# Altium PCB mainV2.PcbDoc (part 1 of 2)
Units mm, origin at the board's own origin, x right, y up, seen from the top; angles counter-clockwise.
Board outline 72.95 x 37.26 mm, 2 copper layers (Top Layer, Bottom Layer); 97 components, 79 nets, 317 pads, 139 vias.
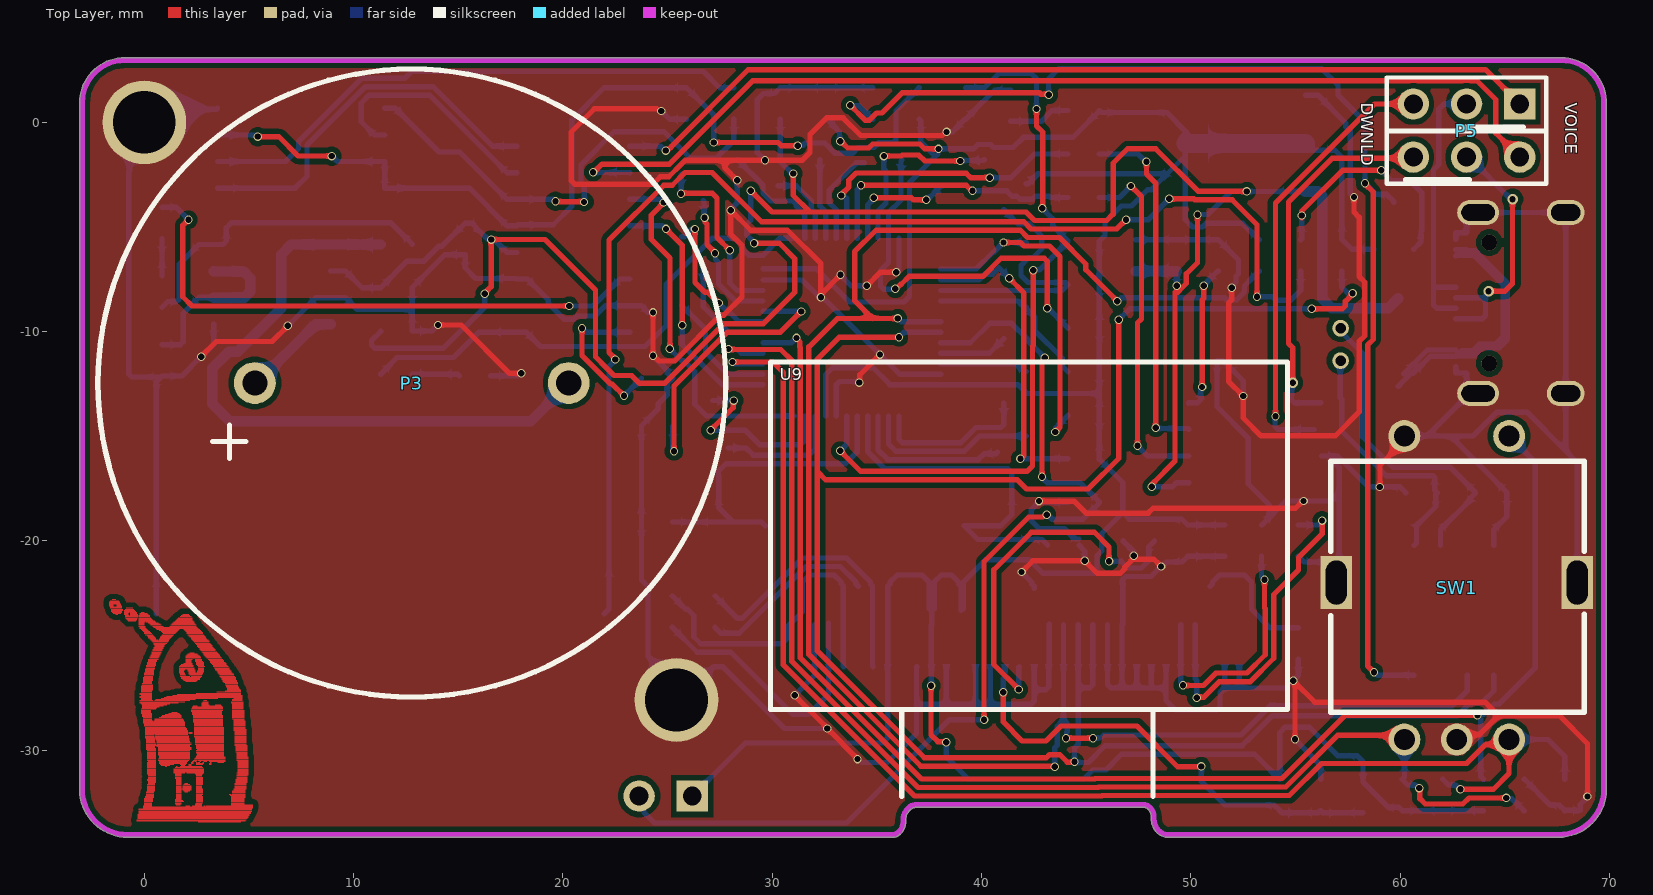
[diagram p0: Top Layer view]
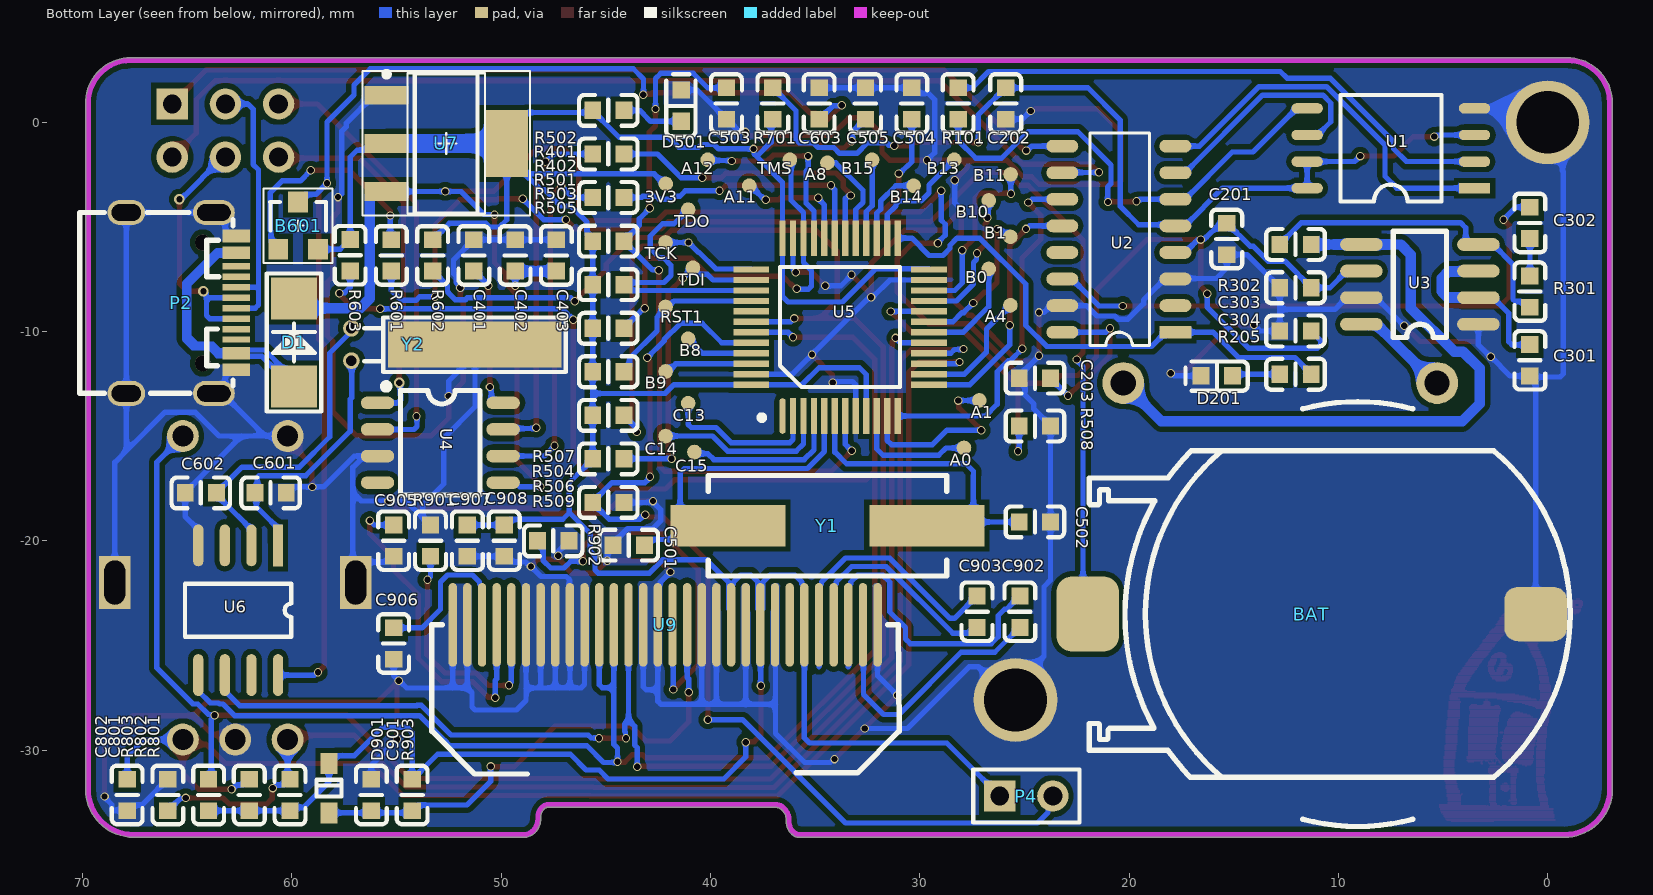
[diagram p1: Bottom Layer view, seen from below]
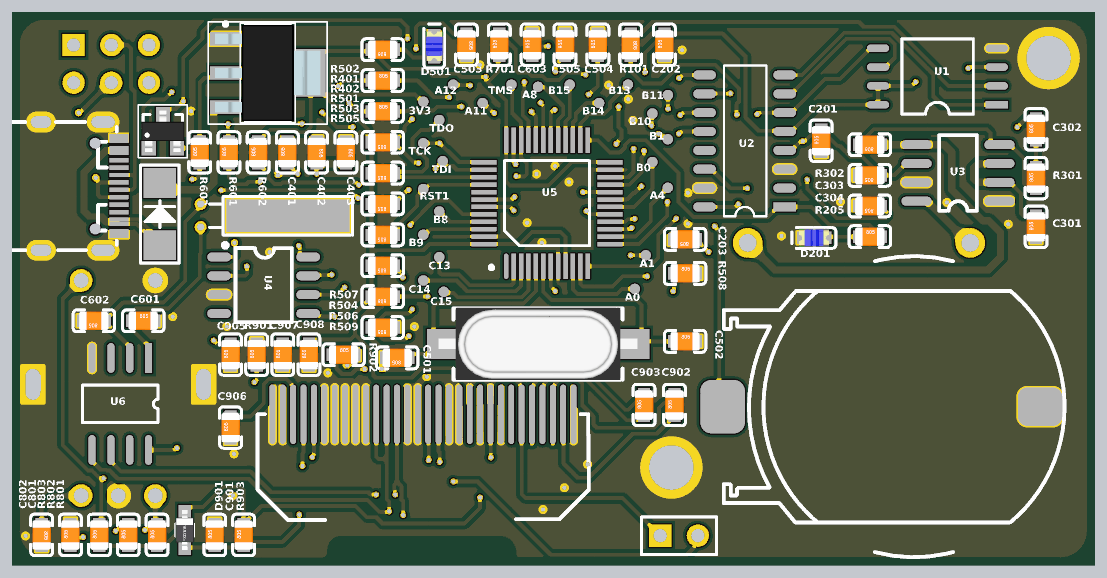
[diagram p3: 3D render of the assembled board from below, using the file's embedded part models]

## Layer stack, top to bottom
Top Solder: solder mask 0.0102, Solder Resist, Dk 3.5
Top Layer: signal copper 0.0356
Dielectric 1: dielectric 0.32, FR-4, Dk 4.8
Bottom Layer: signal copper 0.0356
Bottom Solder: solder mask 0.0102, Solder Resist, Dk 3.5

## Board outline
-0.806,-34.159 -0.804,-34.159 28.917,-34.159 35.722,-34.159 ccw(c35.757,-34.037) 35.757,-34.164 ccw(c35.757,-33.653) 36.119,-34.015 36.157,-33.977 36.157,-33.976 ccw(c35.633,-33.453) 36.374,-33.453 36.374,-33.351 cw(c37.044,-33.351) 36.57,-32.878 cw(c37.463,-33.77) 36.57,-32.878 36.591,-32.857 cw(c36.911,-33.177) 36.911,-32.724 47.752,-32.724 ccw(c47.752,-32.597) 47.76,-32.724 cw(c47.752,-32.98) 47.932,-32.798 cw(c47.55,-33.184) 47.933,-32.799 cw(c52.372,-28.363) 47.932,-32.798 47.971,-32.837 ccw(c49.145,-31.662) 47.972,-32.838 cw(c47.628,-33.181) 48.113,-33.181 48.113,-33.282 ccw(c49.038,-33.282) 48.384,-33.936 48.405,-33.957 ccw(c48.905,-33.456) 48.905,-34.164 49.018,-34.164 ccw(c49.018,-34.036) 49.021,-34.164 55.729,-34.159 67.572,-34.159 ccw(c67.572,-34.032) 67.595,-34.157 ccw(c67.572,-31.871) 69.858,-31.871 69.858,1.022 ccw(c69.731,1.022) 69.855,1.05 ccw(c67.699,0.933) 67.699,3.092 -0.931,3.092 -0.933,3.092 cw(c-0.932,2.965) -0.931,3.092 -0.933,3.092 ccw(c-0.933,0.933) -3.092,0.933 ccw(c-2.965,0.933) -3.092,0.919 ccw(c-2.965,0.905) -3.092,0.905 -3.092,-31.899 ccw(c-2.965,-31.899) -3.092,-31.907 ccw(c-0.806,-31.873)

## Design rules (kind name [scope] priority, off if disabled: settings)
Clearance [All] p1: gap=0.254 ignorepadtopadclearanceinfootprint=FALSE except(0: Arc-Hole Track-Hole SMDPad-Hole THPad-Hole Via-Hole Fill-Hole Poly-Hole Region-Hole Text-Hole; 0.152: Arc-Arc Arc-Track Track-Track)
DiffPairsRouting [All] p1: maxlimit=0.254 minlimit=0.254 mostfreqgap=0.254 toplayer_minwidth=0.254 toplayer_maxwidth=0.381 toplayer_prefwidth=0.381 bottomlayer_minwidth=0.254 bottomlayer_maxwidth=0.381 bottomlayer_prefwidth=0.381 maxuncoupledlength=12.7
HoleSize [All] p1: absolutevalues=TRUE maxlimit=3 minlimit=0.3 maxpercent=80.000 minpercent=20.000
MinimumSolderMaskSliver [All] p1: minsoldermaskwidth=0.152
PolygonConnect [All] p1: connectstyle=Direct reliefconductorwidth=0.254 reliefentries=4 polygonreliefangle="90 Angle" airgapwidth=0.254
RoutingVias [All] p1: holewidth=0.3 width=0.5 viastyle="Through Hole" minholewidth=0.3 minwidth=0.4 maxholewidth=1 maxwidth=1.27
SilkToSilkClearance [All] p1: silktosilkclearance=0.054
SilkToSolderMaskClearance [IsPad] p1: minsilkscreentomaskgap=0.152 clearancetoexposedcopper=TRUE
SolderMaskExpansion [All] p1: expansion=0.102 istentingtop=FALSE
Width VCC3V3 [All] p1: maxlimit=1 minlimit=0.16 preferedwidth=0.254
Width [All] p2: maxlimit=0.254 minlimit=0.254 preferedwidth=0.254
25 further rules are at their usual default settings.

## Classes and differential pairs
component class oled: C901 C902 C903 C905 C906 C907 C908 D901 R901 R902 R903 U9
component class mainV2: 3V3 A0 A1 A4 A8 A11 A12 B0 B1 B8 B9 B10 B11 B13 B14 B15 B601 BAT C13 C14 C15 C201 C202 C203 C301 C302 C303 C304 C401 C402 C403 C501 C502 C503 C504 C505 C601 C602 C603 C801 C802 D1 D201 D501 P2 P3 P4 P5 R101 R205 R301 R302 R401 R402 R501 R502 R503 R504 R505 R506 R507 R508 R509 R601 R602 R603 R701 R801 R802 R803 RST1 SW1 TCK TDI TDO TMS U1 U2 U3 U4 U5 U6 U7 Y1 Y2
differential pair USB: +USB_P -USB_N

## Components (designator, comment, footprint, x,y, rotation, side; value= is the part's Value field where it differs from the comment)
3V3 "Socket" TP 42.139,-2.938 r0 top
A0 "Socket" TP 27.888,-15.556 r180 top
A1 "Socket" TP 27.153,-13.288 r180 top
A4 "Socket" TP 25.669,-8.738 r90 top
A8 "Socket" TP 34.412,-1.934 r180 top
A11 "Socket" TP 38.147,-3.029 r270 top
A12 "Socket" TP 40.131,-1.79 r270 top
B0 "Socket" TP 26.705,-7 r90 top
B1 "Socket" TP 25.669,-5.471 r90 top
B8 "Socket" TP 41.068,-10.335 r90 top
B9 "Socket" TP 42.146,-11.905 r90 top
B10 "Socket" TP 26.705,-3.733 r180 top
B11 "Socket" TP 25.662,-2.487 r180 top
B13 "Socket" TP 28.352,-1.79 r270 top
B14 "Socket" TP 30.294,-3.029 r270 top
B15 "Socket" TP 32.278,-1.79 r270 top
B601 "BAS70-05" SMT_TRIODE_NPN 59.703,-4.937 r180 bottom
BAT "3.6V CR2032-8" CR2032-8 9.072,-23.494 r270 bottom locked
C13 "Socket" TP 41.068,-13.419 r270 top
C14 "Socket" TP 42.146,-14.988 r270 top
C15 "Socket" TP 40.768,-15.752 r270 top
C201 "1uF" 0603_CAP 15.332,-5.572 r90 bottom
C202 "1uF" 0603_CAP 25.893,0.901 r90 bottom
C203 "1uF" 0603_CAP 24.5,-12.219 r0 bottom
C301 "1uF" 0603_CAP 0.847,-11.37 r90 bottom
C302 "1uF" 0603_CAP 0.847,-4.804 r90 bottom
C303 "104" 0603_CAP 12.049,-7.902 r0 bottom
C304 "475" 0603_CAP 12.049,-9.969 r0 bottom
C401 "104" 0603_CAP 51.304,-6.358 r90 bottom
C402 "104" 0603_CAP 49.333,-6.358 r270 bottom
C403 "10uF" 0603_CAP 47.362,-6.358 r270 bottom
C501 "22pF" 0603_CAP 43.904,-20.204 r0 bottom
C502 "22pF" 0603_CAP 24.5,-19.093 r180 bottom
C503 "104" 0603_CAP 39.235,0.901 r270 bottom
C504 "10uF" 0603_CAP 30.381,0.901 r90 bottom
C505 "10uF" 0603_CAP 32.595,0.901 r90 bottom
C601 "15pF" 0603_CAP 61.019,-17.705 r180 bottom
C602 "15pF" 0603_CAP 64.351,-17.705 r0 bottom
C603 "104" 0603_CAP 34.808,0.901 r90 bottom
C801 "104" 0603_CAP 65.927,-32.139 r90 bottom
C802 "104" 0603_CAP 67.872,-32.139 r270 bottom
C901 "10uF" 0603_CAP 56.202,-32.139 r90 bottom
C902 "1uF" 0603_CAP 25.214,-23.382 r90 bottom
C903 "1uF" 0603_CAP 27.265,-23.382 r90 bottom
C905 "4.7uF" 0603_CAP 55.139,-19.987 r90 bottom
C906 "2.2uF" 0603_CAP 55.139,-24.901 r90 bottom locked
C907 "1uF" 0603_CAP 51.616,-19.987 r90 bottom
C908 "1uF" 0603_CAP 49.854,-19.987 r90 bottom
D1 "1N5819/SS14" SMA 59.899,-12.616 r90 bottom
D201 "LED-r" LED-0603 15.806,-12.112 r0 bottom
D501 "LED-r" LED-0603 41.398,0.799 r90 bottom
D901 "1N4148" SOD-323 58.226,-31.81 r270 bottom
P2 "TypeC-16P" "type-c 16pin" 65.286,-8.63 r270 bottom locked
P3 "SPEAKER" Speaker 12.779,-12.455 r0 top locked
P4 "NC" HDR1X2 26.179,-32.188 r180 bottom locked
P5 "NC 3X2" HDR2X3 65.716,0.879 r180 top locked
R101 "100" 0603_CAP 28.168,0.901 r270 bottom
R205 "330" 0603_CAP 12.049,-12.035 r180 bottom
R301 "20K" 0603_CAP 0.847,-8.087 r90 bottom
R302 "47K" 0603_CAP 12.049,-5.836 r0 bottom
R401 "0" 0603_CAP 44.881,-1.511 r180 bottom
R402 "0" 0603_CAP 44.881,-3.593 r180 bottom
R501 "10K" 0603_CAP 44.881,-5.674 r0 bottom
R502 "220" 0603_CAP 44.881,0.57 r0 bottom
R503 "10K" 0603_CAP 44.881,-7.755 r0 bottom
R504 "10K" 0603_CAP 44.881,-13.999 r0 bottom
R505 "10K" 0603_CAP 44.881,-9.837 r0 bottom
R506 "10K" 0603_CAP 44.881,-16.081 r0 bottom
R507 "10K" 0603_CAP 44.881,-11.918 r0 bottom
R508 "100K" 0603_CAP 24.5,-14.51 r180 bottom
R509 "10K" 0603_CAP 44.881,-18.162 r0 bottom
R601 "1K" 0603_CAP 55.247,-6.358 r90 bottom
R602 "4.7K" 0603_CAP 53.276,-6.358 r90 bottom
R603 "4.7K" 0603_CAP 57.218,-6.351 r90 bottom
R701 "0 NC" 0603_CAP 37.022,0.901 r90 bottom
R801 "10K" 0603_CAP 60.092,-32.139 r90 bottom
R802 "10K" 0603_CAP 62.037,-32.139 r90 bottom
R803 "10K" 0603_CAP 63.982,-32.139 r90 bottom
R901 "910K" 0603_CAP 53.377,-19.987 r90 bottom locked
R902 "4.7K" 0603_CAP 47.516,-19.994 r180 bottom locked
R903 "4.7K" 0603_CAP 54.257,-32.139 r90 bottom
RST1 "Socket" TP 42.146,-8.822 r90 top
SW1 "EC11" EC11 62.707,-29.489 r0 top locked
TCK "Socket" TP 42.146,-5.738 r90 top
TDI "Socket" TP 40.838,-6.946 r90 top
TDO "Socket" TP 41.068,-4.169 r90 top
TMS "Socket" TP 36.204,-1.79 r180 top
U1 "W25Q32" SOP8-208mil 3.493,-3.144 r0 bottom locked
U2 "JQ8400-FN" JQF8400-FL 17.788,-10.027 r0 bottom locked
U3 "8002A" 8002A 3.31,-9.646 r0 bottom locked
U4 "CH340N" SOP8 55.909,-13.404 r270 bottom locked
U5 "STM32F103C8T6" LQFP48 36.558,-14.032 r180 bottom locked
U6 "PCF8563T/5" PCF8563 60.663,-20.211 r270 bottom locked
U7 "AMS1117-3.3" SOT-223 52.626,-1.003 r0 bottom locked
U9 "SSD1306" SSD1306 32.016,-24.009 r0 top locked
Y1 "8MHz" HC-49SMD 34.412,-19.273 r0 bottom locked
Y2 "32.768K" Crystal 57.155,-11.386 r90 bottom locked

## Footprints (in the part's own frame and the unit in brackets; to place one, negate y for a bottom-side part, rotate by r counter-clockwise, add the part's x,y. Pads: shape width x height; smd on the part's side, far side on the other; paste and mask are expansions set on the pad)
0603_CAP [mm]
  rect 0.8x0.83 smd: 1(-0.75,0) 2(0.75,0)
  silkscreen extent -1.4,-0.74 1.4,0.74, body extent -1,-0.62 1,0.63, height 0.78
8002A [mil]
  oval 80x24 smd: 1(0,0) 2(0,-50) 3(0,-100) 4(0,-150) 5(220,-150) 6(220,-100) 7(220,-50) 8(220,0)
  silkscreen extent 60,-175 160,25
CR2032-8 [mm] "东莞市科宇塑胶五金有限公司"
  rrect50% 3.6x3 smd: 1(0,-12.9)
  rrect50% 2.6x3 smd: 2(0,8.5)
  silkscreen extent -10.15,-12.83 10.15,10.15
Crystal [mm] "32.768KHz"
  round 0.8 hole 0.5: 1(0,0) 2(1.549,0)
  rect 2.2x8.3 smd: 3(0.762,-5.893)
  silkscreen extent -0.54,-10.24 2.06,-0.61
EC11 [mm]
  round 1.524 hole 1: 1(-2.5,0) 2(0,0) 3(2.5,0) 4(2.5,14.5) 5(-2.5,14.5)
  rect 1.5x2.524 hole 1 slot 2.1 at 90 deg: 6(5.755,7.5) 7(-5.755,7.5)
  silkscreen extent -6.02,1.3 6.09,13.3
HC-49SMD [mm]
  rect 5.5x2 smd: 1(-4.75,0) 2(4.75,0)
  silkscreen extent -5.7,-2.4 5.7,2.4, body extent -6.7,-2.46 6.7,2.44, height 4
HDR1X2 [mm] "Connector; Header; 2 Position"
  rect 1.5x1.5 hole 0.9: 1(0,0)
  round 1.5 hole 0.9: 2(2.54,0)
  silkscreen extent -1.27,-1.27 3.81,1.27
HDR2X3 [mm] "Connector; Header; 3x2 Position"
  rect 1.5x1.5 hole 0.9: 1(0,0)
  round 1.5 hole 0.9: 2(0,2.54) 3(2.54,0) 4(2.54,2.54) 5(5.08,0) 6(5.08,2.54)
  silkscreen extent -1.27,-1.27 6.35,3.81
JQF8400-FL [mil]
  rect 60x24 smd: 1(0,0)
  oval 60x24 smd: 2(0,-50) 3(0,-100) 4(0,-150) 5(0,-200) 6(0,-250) 7(0,-300) 8(0,-350) 9(212.6,-350) 10(212.6,-300) 11(212.6,-250) 12(212.6,-200) 13(212.6,-150) 14(212.6,-100) 15(212.6,-50) 16(212.6,0)
  silkscreen extent 49,-375 161,25
LED-0603 [mm]
  rect 0.821x0.83 smd: 1(-0.75,0) 2(0.75,0)
  silkscreen extent -1.47,-0.69 1.5,0.71, body extent -1.01,-0.62 1.01,0.63, height 1.1
LQFP48 [mm]
  oval 0.3x1.7 smd: 1(0,0)
  rect 0.3x1.7 smd: 2(0.5,0) 3(1,0) 4(1.5,0) 5(2,0) 6(2.5,0) 7(3,0) 8(3.5,0) 9(4,0) 10(4.5,0) 11(5,0) 12(5.5,0) 25(5.5,8.5) 26(5,8.5) 27(4.5,8.5) 28(4,8.5) 29(3.5,8.5) 30(3,8.5) 31(2.5,8.5) 32(2,8.5) 33(1.5,8.5) 34(1,8.5) 35(0.5,8.5) 36(0,8.5)
  rect 1.7x0.3 smd: 13(7,1.5) 14(7,2) 15(7,2.5) 16(7,3) 17(7,3.5) 18(7,4) 19(7,4.5) 20(7,5) 21(7,5.5) 22(7,6) 23(7,6.5) 24(7,7) 37(-1.5,7) 38(-1.5,6.5) 39(-1.5,6) 40(-1.5,5.5) 41(-1.5,5) 42(-1.5,4.5) 43(-1.5,4) 44(-1.5,3.5) 45(-1.5,3) 46(-1.5,2.5) 47(-1.5,2) 48(-1.5,1.5)
  silkscreen extent -1.12,-0.2 5.61,7.12
PCF8563 [mm]
  rect 2x0.49 smd: 1(0,0)
  oval 2x0.49 smd: 2(0,-1.27) 3(0,-2.54) 4(0,-3.81) 5(6.2,-3.81) 6(6.2,-2.54) 7(6.2,-1.27) 8(6.2,0)
  silkscreen extent 1.83,-4.44 4.37,0.64
SMA [mm]
  rect 2x2.2 smd: 1(0,0) 2(4.2,0)
  silkscreen extent -1.2,-1.3 5.4,1.3
SMT_TRIODE_NPN [mm] "Surface mount NPN transistor, package SOT-23"
  rect 0.95x1 smd: 1(-0.95,-1.125) 2(0.95,-1.125) 3(0,1.125)
  silkscreen extent -1.65,-1.78 1.65,1.78, body extent -1.45,-1.4 1.45,1.4, height 1.3
SOD-323 [mm]
  rect 1x0.83 smd: 1(1.18,0) 2(-1.18,0)
  silkscreen extent -0.4,-0.6 0.4,0.6, body extent -1.35,-0.63 1.35,0.63, height 1.1
SOP8 [mm] "CH340N"
  oval 0.6x1.598 smd: 1(0,0) 2(1.27,0) 3(2.54,0) 4(3.81,0) 5(3.81,6) 6(2.54,6) 7(1.27,6) 8(0,6)
  silkscreen extent -0.94,0.26 4.4,4.9
SOP8-208mil [mm]
  rect 1.5x0.5 smd: 1(0,0)
  oval 1.5x0.5 smd: 2(0,-1.27) 3(0,-2.54) 4(0,-3.81) 5(8,-3.81) 6(8,-2.54) 7(8,-1.27) 8(8,0)
  silkscreen extent 1.58,-4.44 6.4,0.64
SOT-223 [mm] "3 LEAD SOT-223 PLASTIC PACKAGE"
  rect 2.1x0.9 smd: 1(2.85,-2.3) 2(2.85,0) 3(2.85,2.3)
  rect 2.1x3.2 smd: 2(-2.85,0)
  silkscreen extent -4,-3.45 4,3.45, body extent -3.54,-3.25 3.54,3.25, height 1.65
Speaker [mm]
  round 2 hole 1.2: 1(-7.5,0) 2(7.5,0)
  silkscreen extent -15,-15 15,15
SSD1306 [mm]
  oval 0.4x4 smd far side: 1(0,0) 2(0.7,0) 3(1.4,0) 4(2.1,0) 5(2.8,0) 6(3.5,0) 7(4.2,0) 8(4.9,0) 9(5.6,0) 10(6.3,0) 11(7,0) 12(7.7,0) 13(8.4,0) 14(9.1,0) 15(9.8,0) 16(10.5,0) 17(11.2,0) 18(11.9,0) 19(12.6,0) 20(13.3,0) 21(14,0) 22(14.7,0) 23(15.4,0) 24(16.1,0) 25(16.8,0) 26(17.5,0) 27(18.2,0) 28(18.9,0) 29(19.6,0) 30(20.3,0)
  Keep-Out Layer lines w0.254: -3.099,-10.023 3.742,-10.023 ; 3.742,-10.028 ccw(c3.742,-9.644) 4.013,-9.916 4.051,-9.878 ccw(c3.618,-9.444) 4.231,-9.444 4.231,-9.342 cw(c5.028,-9.342) 4.464,-8.779 4.485,-8.758 cw(c4.895,-9.169) 4.895,-8.588 5.008,-8.588 15.736,-8.588 ; 15.736,-8.588 cw(c15.736,-8.971) 16.007,-8.7 16.045,-8.738 cw(c15.612,-9.172) 16.225,-9.172 16.225,-9.274 ccw(c17.022,-9.274) 16.458,-9.837 16.479,-9.858 ccw(c16.889,-9.447) 16.889,-10.028 17.002,-10.028 ; 16.946,-10.028 23.713,-10.023
  silkscreen extent -2.1,-8.18 22.6,12.55
TP [mm]
  round 0.7 smd far side: 1(0,0)
"type-c 16pin" [mm] "https://detail.1688.com/offer/564875961516.html?spm=a26352.13672862.offerlist.11.52bd1e62PUNFDG"
  rect 0.3x1.3 smd: A1(-3.35,2.623) A4(-2.55,2.623) A5(-1.25,2.623) A6(-0.25,2.623) A7(0.25,2.623) A8(1.25,2.624) A9(2.55,2.623) A12(3.35,2.623) B1(3.05,2.623) B4(2.25,2.623) B5(1.75,2.623) B6(0.75,2.623) B7(-0.75,2.623) B8(-1.75,2.624) B9(-2.25,2.623) B12(-3.05,2.623)
  oval 1.2x1.8 hole 0.8 slot 1.4 at 90 deg: S1(-4.32,-2.624) S1(4.32,-2.624)
  oval 1.2x2 hole 0.8 slot 1.6 at 90 deg: S1(-4.32,1.556) S1(4.32,1.556)
  round 0.75 hole 0.75 unplated: ""(-2.89,1.026) ""(2.89,1.026)
  silkscreen extent -4.32,-4.86 4.32,2.47

## Part data
B601: library part "BAS70 74", "贴片三极管  丝印75"
BAT: library part Battery, "电池座 半圆形", LatestRevisionDate=17-Jul-2002, LatestRevisionNote="Re-released for DXP Platform.", PackageReference=BAT-2, Published=24-Mar-1999, Publisher="Altium Limited"
C201 C202 C203 C301 C302 C303 C304 C401 C402 C403 C501 C502 C503 C504 C505 C601 C602 C603 C801 C802 C901 C902 C903 C905 C906 C907 C908: library part Cap, "Capacitor 0603", LatestRevisionDate=17-Jul-2002, LatestRevisionNote="Re-released for DXP Platform.", PackageReference=RAD-0.3, Published=8-Jun-2000, Publisher="Altium Limited"
  C201 C202 C203 C301 C302 C303 C304 C401 C402 C403 C901 C902 C903 C905 C906 C907 C908: PackageDescription="Radial Cap, Thru-Hole; 2 Leads; 0.3 in Pin Spacing"
D1: library part SMT_DIODE_SCHOTTKY_SOD_323, "肖特基整流二极管SOD-323"
D201 D501: library part LED2, "NC", LatestRevisionDate=17-Jul-2002, LatestRevisionNote="Re-released for DXP Platform.", PackageReference=3.2X1.6X1.1, PackageVersion=Feb-2002, Published=8-Jun-2000, Publisher="Altium Limited"
D901: library part Diode, "IN4148 0805 SOD323", Code_JEDEC=DO-214-AB, LatestRevisionDate=17-Jul-2002, LatestRevisionNote="Re-released for DXP Platform.", PackageDescription="DO-214-AB/SMC; 2 C-Bend Leads; Body 7.9 x 5.9 mm, inc. leads (LxW)", PackageReference=SMC, PackageVersion=Sep-1996, Published=8-Jun-2000, Publisher="Altium Limited"
P3: library part "Header 2", "扬声器", LatestRevisionDate=17-Jul-2002, LatestRevisionNote="Re-released for DXP Platform.", Publisher="Altium Limited"
P4: library part "Header 2", "下载短接口", LatestRevisionDate=17-Jul-2002, LatestRevisionNote="Re-released for DXP Platform.", Publisher="Altium Limited"
P5: library part "Header 3X2", "USB跳线接口", LatestRevisionDate=17-Jul-2002, LatestRevisionNote="Re-released for DXP Platform.", Publisher="Altium Limited"
R101 R205 R301 R302 R401 R402 R501 R502 R503 R504 R505 R506 R507 R508 R509 R601 R602 R603 R701 R801 R802 R803 R901 R902 R903: library part Res2, "Resistor 0603", LatestRevisionDate=17-Jul-2002, LatestRevisionNote="Re-released for DXP Platform.", PackageReference=AXIAL-0.4, Published=8-Jun-2000, Publisher="Altium Limited"
  R101 R205 R301 R302 R401 R402 R801 R802 R803: PackageDescription="Axial Device, Thru-Hole; 2 Leads; 0.4 in Pin Spacing"
SW1: "旋转编码器20脉冲"
U1: "Flash"
U3: "3W功放"
U4: library part ch340, "U转串"
U5: library part STM32F101CB, "单片机"
U6: library part PCF8563, "时钟芯片"
U7: library part NCP1117
Y1: library part XTAL, "49S型直插无源晶振", LatestRevisionDate=17-Jul-2002, LatestRevisionNote="Re-released for DXP Platform.", PackageReference=R38, Published=8-Jun-2000, Publisher="Altium Limited"
Y2: library part XTAL, "圆柱型3*8mm无源晶振", LatestRevisionDate=17-Jul-2002, LatestRevisionNote="Re-released for DXP Platform.", PackageReference=R38, Published=8-Jun-2000, Publisher="Altium Limited"
3V3 A0 A1 A4 A8 A11 A12 B0 B1 B8 B9 B10 B11 B13 B14 B15 C13 C14 C15 RST1 TCK TDI TDO TMS: LatestRevisionDate=17-Jul-2002, LatestRevisionNote="Re-released for DXP Platform.", Publisher="Altium Limited"

## Free pads (board coordinates)
  round 4 hole 3: ""(0,0) ""(25.424,-27.596)

## Via types
v1: diameter 0.4, hole 0.3, Top Layer to Bottom Layer, 136 vias
v2: diameter 0.5, hole 0.3, Top Layer to Bottom Layer, 3 vias

## Nets (pads, with @x,y where several pads share a name; then routed paths per layer and width w, separated by ;. In a path a pad name is that pad's centre, name@x,y a point inside that pad or via, vN(x,y) a via of type N, cw(c..) or ccw(c..) an arc to the next point about the centre after c; other vN are vias at no path point)
3.3V: C202.2 R701.2 U1.3 U1.7 U1.8 U2.5 | length 45.5
  Top Layer w0.254: v1@5.411,-0.674 5.425,-0.688 6.426,-0.688 7.35,-1.612 v1(8.96,-1.612) ; v1(27.209,-0.961) 30.277,-0.961 30.431,-1.115 v1(31.22,-1.115)
  Bottom Layer w0.254: U1.3@3.493,-0.604 5.301,-0.604 5.378,-0.681 v1(5.418,-0.681) ; v1(8.96,-1.612) 9.222,-1.874 U1.7@11.493,-1.874 U1.8@11.493,-3.144 15.528,-3.144 17.331,-4.947 U2.5@17.788,-4.947 17.84,-4.895 19.537,-4.895 20.426,-4.006 20.426,0.11 21.967,1.651 25.908,1.651 27.209,0.35 v1(27.209,-0.961) ; v1(31.22,-1.115) 31.248,-1.087 31.476,-1.087 31.574,-0.989 32.511,-0.989 33.005,-1.483 33.829,-1.483 34.109,-1.203 34.867,-1.203 35.095,-0.975 35.761,-0.975 35.91,-0.826 35.91,0.554 37.007,1.651 R701.2@37.022,1.651
BUSY: R205.2 U2.1 U5.25 | length 25
  Bottom Layer w0.254: R205.2@11.299,-12.035 11.299,-12.02 12.08,-11.239 14.775,-11.239 15.987,-10.027 U2.1@17.788,-10.027 18.245,-10.027 18.931,-10.713 23.929,-10.713 24.938,-9.704 24.938,-7.733 27.139,-5.532 28.213,-5.532 28.553,-5.872 28.553,-6.018 28.893,-6.358 29.551,-6.358 30.377,-5.532 U5.25@31.058,-5.532
CS: A4.1 U5.14 | length 5.9
  Bottom Layer w0.254: A4.1@25.669,-8.738 26.811,-9.88 26.811,-10.979 27.864,-12.032 U5.14@29.558,-12.032
DACL: C302.2 U2.14 | length 27.4
  Top Layer w0.254: v1(2.107,-4.65) 1.834,-4.923 1.834,-8.332 2.275,-8.773 v1(20.307,-8.773)
  Bottom Layer w0.254: C302.2@0.847,-4.054 1.511,-4.054 v1(2.107,-4.65) ; v1(20.307,-8.773) 21.445,-8.773 22.731,-7.487 U2.14@23.188,-7.487
EC11_A: C801.1 R801.2 SW1.1 U5.16 | length 61.2
  Top Layer w0.254: v1(27.908,-10.827) 27.933,-10.852 30.407,-10.852 30.939,-11.384 30.939,-25.756 36.965,-31.781 45.572,-31.781 45.593,-31.761 54.537,-31.761 57.008,-29.29 60.008,-29.29 SW1.1@60.207,-29.489 ; v1(60.914,-31.81) 60.942,-31.838 60.942,-32.314 61.201,-32.573 62.996,-32.573 63.29,-32.279 v1(65.072,-32.279)
  Bottom Layer w0.254: v1(27.908,-10.827) 27.936,-10.855 28.342,-10.855 28.519,-11.032 U5.16@29.558,-11.032 ; SW1.1@60.207,-29.489 60.207,-31.274 R801.2@60.092,-31.389 60.365,-31.662 60.726,-31.662 60.874,-31.81 v1(60.914,-31.81) ; v1(65.072,-32.279) 65.1,-32.307 65.33,-32.307 65.912,-32.889 C801.1@65.927,-32.889
EC11_B: C802.1 R802.2 SW1.3 U5.15 | length 65.9
  Top Layer w0.254: v1(28.105,-11.451) 30.033,-11.451 30.533,-11.951 30.533,-25.924 36.796,-32.188 45.741,-32.188 45.761,-32.167 54.705,-32.167 56.241,-30.632 63.18,-30.632 64.08,-29.732 64.964,-29.732 SW1.3@65.207,-29.489 65.207,-31.115 64.456,-31.866 v1(62.881,-31.866)
  Bottom Layer w0.254: v1(28.105,-11.451) 28.144,-11.451 28.225,-11.532 U5.15@29.558,-11.532 ; R802.2@62.037,-31.389 62.31,-31.662 62.637,-31.662 62.841,-31.866 v1(62.881,-31.866) ; SW1.3@65.207,-29.489 67.07,-29.489 67.872,-30.291 C802.1@67.872,-31.389
EC11_Key: R803.2 SW1.4 U5.17 | length 71.7
  Top Layer w0.254: v1(31.157,-10.299) 31.157,-10.339 31.318,-10.5 31.318,-10.726 31.346,-10.754 31.346,-25.587 37.133,-31.375 45.404,-31.375 45.424,-31.355 54.355,-31.355 57.385,-28.325 v1(63.694,-28.325)
  Bottom Layer w0.254: U5.17@29.558,-10.532 30.924,-10.532 v1(31.157,-10.299) ; R803.2@63.982,-31.389 63.85,-31.257 63.85,-28.52 63.646,-28.317 63.646,-28.277 63.666,-28.297 63.992,-28.297 64.497,-27.792 64.732,-27.792 66.451,-26.073 66.451,-16.233 SW1.4@65.207,-14.989
GND: BAT.2 C201.1 C202.1 C203.2 C301.1 C303.2 C304.2 C401.2 C402.1 C403.1 C501.2 C502.2 C503.2 C504.2 C505.2 C601.2 C602.2 C603.2 C801.2 C802.2 C901.2 C905.1 C906.1 C907.1 C908.1 D201.2 D501.2 P2.A1 P2.A12 P2.B1 P2.B12 P2.S1 pad. R508.2 R509.1 R901.2 R902.2 SW1.2 SW1.5 SW1.6 SW1.7 U1.4 U2.3 U2.15 U3.1 U3.7 U4.3 U5.8 U5.23 U5.35 U5.47 U6.4 U7.1 U9.1 U9.8 U9.10 U9.12 U9.13 U9.16 U9.17 U9.21 U9.22 U9.23 U9.24 U9.25 U9.29 U9.30 Y2.3 | length 412.9
  Top Layer w0.254: v1(2.716,-11.195) 3.437,-10.474 6.104,-10.474 v1(6.853,-9.725) ; v1(14.028,-9.683) 15.141,-9.683 17.451,-11.993 v1(18.004,-11.993) ; v1(24.304,-9.081) v1(24.304,-11.157) 24.343,-11.157 24.587,-11.4 25.345,-11.4 27.531,-9.214 27.683,-9.214 28.553,-8.344 28.553,-5.872 28.014,-5.333 v1(28.014,-4.195) 28.976,-5.157 30.733,-5.157 32.326,-6.75 v1(32.326,-8.353) ; 24.479,0.642 21.497,0.642 20.398,-0.457 20.398,-2.788 20.573,-2.963 24.292,-2.963 24.656,-2.599 25.057,-2.599 25.666,-1.99 25.841,-1.815 27.746,-1.815 ; v1(28.323,-2.766) 27.746,-2.189 27.746,-1.815 ; v1(31.073,-27.379) 31.073,-27.39 32.634,-28.951 v1(32.634,-28.961) 32.634,-28.972 34.076,-30.414 v1(34.076,-30.424) ; v1@32.354,-8.192 v1(33.264,-7.282) ; v1(34.153,-12.434) 34.181,-12.406 34.181,-12.063 v1(35.147,-11.097) ; v1(34.517,-7.814) 35.175,-7.156 v1(35.924,-7.156) ; v1(38.332,-0.457) 38.292,-0.457 38.124,-0.625 34.23,-0.625 33.39,0.215 32.592,0.215 31.801,-0.576 31.801,-1.444 31.43,-1.815 v1(29.652,-1.815) 27.746,-1.815 ; v1(41.914,-21.485) 42.449,-20.949 v1(44.933,-20.949) 45.531,-21.548 46.627,-21.548 46.84,-21.335 46.84,-21.265 47.205,-20.9 47.205,-20.827 47.278,-20.754 v1(47.278,-20.715) ; v1(42.749,-18.097) 44.415,-18.097 44.989,-18.671 47.961,-18.671 48.192,-18.44 54.998,-18.44 55.348,-18.09 v1(55.388,-18.09) ; v1@47.306,-20.869 48.23,-20.869 v1(48.58,-21.219) ; v1(51.952,-7.898) 51.952,-8.489 51.807,-8.634 51.807,-12.378 v1(52.507,-13.078) 52.507,-14.128 53.361,-14.982 56.903,-14.982 58.044,-13.841 58.044,-10.467 58.31,-10.201 58.31,-7.634 58.044,-7.367 58.044,-4.538 57.799,-4.293 v1(57.799,-3.572) ; v1(54.901,-26.679) v1@54.978,-26.756 ; v1(54.978,-29.479) v1@54.978,-26.756 ; v1(59.031,-17.425) 59.038,-17.418 59.038,-16.382 60.207,-15.213 SW1.5@60.207,-14.989 ; SW1.2@62.707,-29.489 62.95,-29.246 63.8,-29.246 64.7,-28.346 ; v1(68.95,-32.209) 68.95,-29.689 67.607,-28.346 64.7,-28.346 ; v1@54.978,-26.756 55.923,-27.701 64.055,-27.701 64.7,-28.346
  Bottom Layer w0.254: BAT.2@0.572,-23.494 0.572,-12.393 C301.1@0.797,-12.168 ; v1(2.716,-11.195) 1.791,-12.12 C301.1@0.847,-12.12 0.799,-12.168 C301.1@0.797,-12.168 ; v1@2.73,-11.209 3.31,-10.629 U3.1@3.31,-9.646 ; U1.4@3.493,0.666 3.446,0.619 0.619,0.619 pad.@0,0 -0.717,-0.717 -0.717,-2.336 -0.747,-2.366 -0.747,-12.019 -0.598,-12.168 C301.1@0.797,-12.168 ; v1(6.853,-9.725) 8.202,-8.376 U3.7@8.898,-8.376 9.609,-8.376 10.169,-8.936 12.799,-8.936 ; v1(14.028,-9.683) 13.742,-9.969 C304.2@12.799,-9.969 12.799,-8.936 ; D201.2@16.556,-12.112 17.845,-12.112 17.964,-11.993 v1(18.004,-11.993) ; v1(24.304,-11.157) 24.977,-11.83 24.977,-11.946 C203.2@25.25,-12.219 24.977,-12.492 24.977,-13.028 24.549,-13.456 24.549,-13.696 23.75,-14.495 R508.2@23.75,-14.51 C502.2@23.75,-19.093 23.75,-21.873 24.066,-22.189 24.066,-25.503 25.424,-26.861 pad.@25.424,-27.596 25.611,-27.596 27.201,-26.006 27.629,-26.006 30.584,-28.961 v1(32.634,-28.961) ; v1(24.304,-9.081) 24.065,-9.081 23.741,-8.757 U2.15@23.188,-8.757 22.036,-8.757 21.536,-9.256 20.668,-9.256 20.521,-9.403 20.048,-9.403 19.306,-8.661 19.306,-8.491 18.302,-7.487 U2.3@17.788,-7.487 17.758,-7.457 15.827,-7.457 15.332,-6.962 C201.1@15.332,-6.322 14.364,-6.322 12.799,-7.887 C303.2@12.799,-7.902 12.799,-8.936 ; v1(24.703,0.544) 25.096,0.151 C202.1@25.893,0.151 ; v1(28.014,-4.195) 28.014,-4.155 28.323,-3.846 v1(28.323,-2.766) ; U5.23@29.558,-7.532 31.428,-7.532 32.249,-8.353 v1(32.326,-8.353) 32.403,-8.353 v1(35.147,-11.097) 36.082,-12.032 U5.47@38.058,-12.032 ; v1(29.652,-1.815) 29.288,-1.451 29.288,1.09 29.576,1.378 30.108,1.378 C504.2@30.381,1.651 C505.2@32.595,1.651 C603.2@34.808,1.651 ; v1(31.073,-27.379) 32.016,-26.436 U9.1@32.016,-24.009 ; U5.8@33.058,-14.032 33.058,-12.542 33.215,-12.385 34.104,-12.385 v1(34.153,-12.434) ; v1(33.264,-7.282) 33.264,-7.303 33.775,-7.814 v1(34.517,-7.814) ; v1(34.076,-30.424) 34.115,-30.424 34.276,-30.585 35.497,-30.585 36.89,-29.192 36.89,-27.806 ; v1(35.924,-7.156) 36.058,-7.022 U5.35@36.058,-5.532 ; U9.8@36.916,-26.006 36.89,-26.032 36.89,-27.806 ; 38.316,-27.841 38.316,-27.806 ; U9.10@38.316,-26.006 38.316,-27.806 ; v1(38.332,-0.457) 38.345,-0.444 38.625,-0.444 39.22,0.151 C503.2@39.235,0.151 39.25,0.151 39.523,0.424 39.523,0.439 40.634,1.549 D501.2@41.398,1.549 ; U9.12@39.718,-26.008 39.718,-27.806 ; U9.13@40.416,-26.006 40.416,-27.806 ; v1(41.914,-21.485) 42.397,-21.968 42.397,-22.05 42.516,-22.169 U9.16@42.516,-22.277 ; U9.16@42.516,-26.006 42.516,-27.113 ; v1@42.701,-18.049 42.741,-18.049 42.853,-18.162 R509.1@44.131,-18.162 ; v1(42.749,-18.097) 42.749,-18.137 42.38,-18.506 42.38,-19.04 42.748,-19.408 43.415,-19.408 43.419,-19.404 43.959,-19.404 44.465,-19.91 C501.2@44.661,-19.91 ; U9.17@43.244,-25.978 43.216,-26.006 43.216,-26.964 43.067,-27.113 42.516,-27.113 ; U9.17@43.244,-25.876 U9.17@43.244,-23.965 ; C501.2@44.654,-20.204 44.927,-20.477 44.927,-20.944 v1(44.933,-20.949) ; U9.21@46.016,-24.009 46.016,-26.864 46.181,-27.029 46.716,-27.029 ; R902.2@46.766,-19.994 46.766,-20.009 47.278,-20.521 v1(47.278,-20.715) ; C403.1@47.362,-5.608 C402.1@49.333,-5.608 C401.2@51.304,-5.608 51.319,-5.608 52.283,-6.572 52.283,-7.228 52.156,-7.355 52.156,-7.654 51.952,-7.859 v1(51.952,-7.898) ; U9.23@47.416,-26.006 47.416,-27.029 ; U9.24@48.116,-26.006 48.116,-26.88 48.265,-27.029 ; U9.25@48.816,-26.006 48.816,-27.029 ; U9.29@51.616,-26.006 51.616,-27.029 ; C907.1@51.616,-20.737 C908.1@49.854,-20.737 49.581,-21.01 48.828,-21.01 48.619,-21.219 v1(48.58,-21.219) 48.097,-21.702 46.893,-21.702 46.744,-21.851 46.744,-23.981 U9.22@46.716,-24.009 46.716,-27.029 ; U9.30@52.316,-26.006 52.316,-27.029 ; v1(52.507,-13.078) 52.507,-12.365 51.534,-11.392 51.248,-11.392 51.248,-13.59 52.738,-15.08 52.738,-17.27 53.747,-18.279 R901.2@53.747,-18.882 ; R901.2@53.377,-19.237 53.392,-19.237 R901.2@53.747,-18.882 ; v1(54.978,-29.479) 56.202,-30.703 C901.2@56.202,-31.389 ; C906.1@55.139,-25.651 55.139,-26.432 54.901,-26.67 v1(54.901,-26.679) 54.861,-26.679 54.511,-27.029 52.316,-27.029 ; C905.1@55.139,-20.737 55.412,-21.01 56.329,-21.01 56.952,-21.633 SW1.7@56.952,-21.989 57.089,-21.852 57.089,-17.682 ; U7.1@55.476,1.297 56.076,1.297 57.4,-0.027 57.4,-0.205 57.624,-0.429 57.624,-3.418 ; U4.3@56.263,-15.944 57.017,-15.944 58.49,-17.417 59.996,-17.417 60.269,-17.69 C601.2@60.269,-17.705 ; U4.3@56.581,-15.976 57.089,-16.484 57.089,-17.682 ; SW1.5@60.207,-14.989 61.285,-14.989 ; P2.B1@62.663,-11.68 P2.A12@62.663,-11.98 63.163,-11.98 63.186,-12.003 63.186,-12.513 P2.S1@63.623,-12.95 ; P2.B12@62.663,-5.58 P2.A1@62.663,-5.28 63.163,-5.28 63.186,-5.257 63.186,-4.747 63.623,-4.31 P2.S1@63.73,-4.31 P2.S1@67.91,-4.31 P2.S1@67.91,-12.95 67.91,-15.692 ; P2.S1@63.73,-12.95 P2.S1@63.623,-12.95 ; U6.4@64.473,-20.211 64.473,-19.456 65.101,-18.828 C602.2@65.101,-17.705 65.101,-17.69 62.4,-14.989 ; C801.2@65.927,-31.389 65.942,-31.389 67.169,-32.616 67.599,-32.616 C802.2@67.872,-32.889 67.888,-32.873 68.609,-32.873 68.609,-32.59 68.95,-32.249 v1(68.95,-32.209) ; SW1.6@68.462,-21.989 68.462,-16.244 67.91,-15.692 ; 36.89,-27.806 38.316,-27.806 ; 38.316,-27.806 39.718,-27.806 ; 39.718,-27.806 40.416,-27.806 ; 40.416,-27.806 42.367,-27.806 42.516,-27.657 42.516,-27.113 ; 46.716,-27.029 47.416,-27.029 ; 47.416,-27.029 48.265,-27.029 ; 48.265,-27.029 48.816,-27.029 ; 48.816,-27.029 48.816,-27.622 49.273,-28.079 51.245,-28.079 51.394,-27.93 51.394,-27.251 51.616,-27.029 ; 51.616,-27.029 52.316,-27.029 ; R901.2@53.747,-18.882 54.539,-18.09 v1(55.388,-18.09) 56.681,-18.09 57.089,-17.682 ; 61.285,-14.989 63.324,-12.95 P2.S1@63.623,-12.95 ; 61.285,-14.989 62.4,-14.989 ; 62.4,-14.989 63.479,-14.989 64.622,-13.846 66.064,-13.846 67.91,-15.692
I2C_SCL: R602.1 U5.42 U6.6 U9.18 | length 90.1
  Top Layer w0.254: v1(36.001,-9.368) 34.783,-9.368 ; v1(43.498,-30.794) 43.471,-30.767 37.1,-30.767 31.752,-25.419 31.752,-10.726 33.11,-9.368 34.783,-9.368 ; v1(44.035,-29.423) v1(45.325,-29.423) ; v1(46.487,-8.542) 44.982,-7.037 44.982,-6.764 43.723,-5.505 42.202,-5.505 41.855,-5.157 34.955,-5.157 33.936,-6.176 33.936,-8.521 34.783,-9.368
  Bottom Layer w0.254: v1(36.001,-9.368) 36.165,-9.532 U5.42@38.058,-9.532 ; v1(43.498,-30.794) 43.498,-29.866 43.622,-29.742 43.622,-28.853 43.916,-28.559 ; U9.18@43.916,-24.009 43.916,-28.559 ; v1(44.035,-29.423) 44.063,-29.395 44.063,-29.133 44.1,-29.096 44.1,-28.744 43.916,-28.559 ; v1(45.325,-29.423) 45.332,-29.416 45.696,-29.416 45.843,-29.269 52.395,-29.269 53.809,-27.855 54.019,-27.855 54.033,-27.869 62.5,-27.869 63.203,-27.166 U6.6@63.203,-26.411 ; v1(46.487,-8.542) 46.526,-8.542 46.68,-8.388 51.62,-8.388 51.711,-8.479 52.192,-8.479 52.533,-8.139 52.533,-8.112 52.563,-8.082 52.563,-7.806 53.261,-7.108 R602.1@53.276,-7.108
I2C_SDA: R603.1 U5.43 U6.5 U9.19 U9.20 | length 102.7
  Top Layer w0.254: v1(36.057,-10.264) 33.208,-10.264 32.158,-11.314 32.158,-16.683 ; v1(44.443,-30.55) 44.422,-30.571 44.097,-30.571 43.739,-30.213 43.257,-30.213 43.109,-30.361 37.268,-30.361 32.158,-25.251 32.158,-16.683 ; v1(46.557,-9.431) 46.557,-16.053 45.094,-17.516 42.154,-17.516 41.721,-17.083 32.558,-17.083 32.158,-16.683 ; v1(55.776,-8.913) 57.234,-8.913 57.383,-8.764 57.383,-8.556 57.729,-8.21 v1(57.729,-8.17)
  Bottom Layer w0.254: v1(36.057,-10.264) 36.289,-10.032 U5.43@38.058,-10.032 ; U9.19@44.616,-24.009 44.616,-27.015 ; U9.20@45.316,-24.009 45.316,-26.866 45.167,-27.015 44.616,-27.015 ; v1(46.557,-9.431) 47.075,-8.913 v1(55.776,-8.913) ; R603.1@57.218,-7.101 57.218,-7.882 57.478,-8.142 57.701,-8.142 v1(57.729,-8.17) ; U6.5@64.473,-26.411 64.473,-27.166 63.895,-27.744 63.51,-27.744 63.462,-27.792 63.291,-27.792 62.737,-28.346 53.913,-28.346 52.738,-29.521 52.718,-29.521 52.453,-29.786 45.903,-29.786 45.104,-30.585 44.443,-30.585 v1(44.443,-30.55) 44.443,-29.902 44.616,-29.729 44.616,-27.015
IRQ: B10.1 U5.21 | length 6.8
  Top Layer w0.254: v1(26.768,-4.559) 26.796,-4.587 26.796,-4.766 26.887,-4.857 26.887,-5.835 27.265,-6.213 v1(27.265,-6.253)
  Bottom Layer w0.254: B10.1@26.705,-3.733 26.74,-3.768 26.74,-4.531 v1(26.768,-4.559) ; v1(27.265,-6.253) 27.293,-6.281 27.293,-6.554 27.436,-6.697 27.436,-7.723 28.245,-8.532 U5.21@29.558,-8.532
JNTRST: R507.1 RST1.1 U5.40 | length 8.1
  Bottom Layer w0.254: U5.40@38.058,-8.532 41.736,-8.532 42.025,-8.822 RST1.1@42.146,-8.822 42.146,-8.898 42.56,-9.312 42.56,-9.963 43.858,-11.261 43.858,-11.645 R507.1@44.131,-11.918
JTCK: R504.1 TCK.1 U5.37 | length 17.1
  Top Layer w0.254: v1(41.05,-5.738) 41.861,-5.738 42.034,-5.911 43.251,-5.911 43.75,-6.411 43.75,-14.569 v1(43.526,-14.793)
  Bottom Layer w0.254: U5.37@38.058,-7.007 39.743,-7.007 40.536,-6.215 40.574,-6.215 v1(41.05,-5.738) TCK.1@42.146,-5.738 ; v1(43.526,-14.793) 43.554,-14.765 43.554,-14.592 44.131,-14.014 R504.1@44.131,-13.999
JTDI: R506.1 TDI.1 U5.38 | length 15
  Top Layer w0.254: v1(41.323,-7.451) 42.025,-8.153 42.025,-15.916 41.874,-16.067 v1(41.859,-16.067)
  Bottom Layer w0.254: U5.38@38.058,-7.532 39.097,-7.532 39.882,-7.532 40.162,-7.252 40.532,-7.252 TDI.1@40.838,-6.946 40.838,-6.956 41.323,-7.441 v1(41.323,-7.451) ; v1(41.859,-16.067) 44.118,-16.067 R506.1@44.131,-16.081
JTDO: R503.1 TDO.1 U5.39 | length 13.4
  Bottom Layer w0.254: U5.39@38.058,-8.032 43.858,-8.032 44.131,-7.759 44.027,-7.654 42.228,-7.654 41.888,-7.314 41.888,-6.833 42.251,-6.469 42.449,-6.469 42.877,-6.041 42.877,-5.436 42.286,-4.845 41.744,-4.845 TDO.1@41.068,-4.169
JTMS: R505.1 TMS.1 U5.34 | length 18.8
  Top Layer w0.254: v1(35.879,-7.947) 35.919,-7.947 36.08,-7.786 36.09,-7.786 36.139,-7.737 36.165,-7.737 36.543,-7.359 40.069,-7.359 40.936,-6.492 42.992,-6.492 43.141,-6.641 v1(43.141,-8.885)
  Bottom Layer w0.254: v1(35.879,-7.947) 35.852,-7.975 35.32,-7.975 35.171,-7.826 35.171,-7.087 35.558,-6.7 U5.34@35.558,-5.532 35.558,-4.314 36.152,-3.721 36.152,-1.843 TMS.1@36.204,-1.79 ; v1(43.141,-8.885) 43.169,-8.913 43.223,-8.913 44.131,-9.822 R505.1@44.131,-9.837
key: B14.1 U5.27 | length 3.7
  Bottom Layer w0.254: B14.1@30.294,-3.029 31.147,-3.029 31.872,-3.754 31.872,-4.154 32.058,-4.341 U5.27@32.058,-5.532
NetA0_1: A0.1 U5.10 | length 6
  Bottom Layer w0.254: A0.1@27.888,-15.556 28.747,-15.556 29.096,-15.906 31.752,-15.906 32.058,-15.6 U5.10@32.058,-14.032
NetA1_1: A1.1 U5.11 | length 8.9
  Top Layer w0.254: v1(27.062,-14.709) 28.14,-13.631 28.14,-13.323 v1(28.168,-13.295)
  Bottom Layer w0.254: v1(27.062,-14.709) 28.703,-14.709 29.396,-15.402 31.353,-15.402 31.558,-15.197 U5.11@31.558,-14.032 ; A1.1@27.153,-13.288 27.156,-13.292 28.164,-13.292 v1(28.168,-13.295)
NetA8_1: A8.1 U5.29 | length 4.7
  Bottom Layer w0.254: U5.29@33.058,-5.532 33.058,-4.171 32.711,-3.824 32.711,-3.245 34.022,-1.934 A8.1@34.412,-1.934
NetA11_1: A11.1 U5.32 | length 5.7
  Top Layer w0.254: v1(34.857,-3.607) 36.658,-3.607 36.756,-3.705 v1(37.366,-3.705)
  Bottom Layer w0.254: U5.32@34.558,-5.532 34.558,-3.946 34.857,-3.647 v1(34.857,-3.607) ; v1(37.366,-3.705) 37.405,-3.705 38.081,-3.029 A11.1@38.147,-3.029
NetA12_1: A12.1 U5.33 | length 9.1
  Top Layer w0.254: v1(35.336,-1.612) 36.159,-1.612 36.215,-1.556 36.998,-1.556 37.292,-1.85 v1(38.983,-1.85)
  Bottom Layer w0.254: U5.33@35.058,-5.532 35.058,-4.24 35.438,-3.859 35.438,-2.32 35.336,-2.218 v1(35.336,-1.612) ; v1(38.983,-1.85) 39.011,-1.822 40.099,-1.822 A12.1@40.131,-1.79
NetB0_1: B0.1 U5.18 | length 5.2
  Bottom Layer w0.254: B0.1@26.705,-7 26.705,-8.808 27.929,-10.032 U5.18@29.558,-10.032
NetB1_1: B1.1 U5.19 | length 7.4
  Top Layer w0.254: v1(26.306,-5.098) 26.306,-7.646 26.785,-8.125 26.935,-8.125 v1(27.442,-8.633)
  Bottom Layer w0.254: B1.1@25.669,-5.471 25.79,-5.471 26.163,-5.098 v1(26.306,-5.098) ; v1(27.442,-8.633) 27.902,-9.093 27.984,-9.093 28.423,-9.532 U5.19@29.558,-9.532
NetB8_1: B8.1 U5.45 | length 3.3
  Bottom Layer w0.254: U5.45@38.058,-11.032 40.371,-11.032 B8.1@41.068,-10.335
NetB9_1: B9.1 U5.46 | length 4.2
  Bottom Layer w0.254: U5.46@38.058,-11.532 41.652,-11.532 42.025,-11.905 B9.1@42.146,-11.905
NetB11_1: B11.1 U5.22 | length 8.8
  Top Layer w0.254: v1(25.641,-3.411) 25.669,-3.383 27.132,-3.383 27.363,-3.614 27.363,-5.504 v1(27.972,-6.113)
  Bottom Layer w0.254: v1(25.641,-3.411) 25.651,-3.401 25.651,-2.498 B11.1@25.662,-2.487 ; v1(27.972,-6.113) 27.972,-7.677 28.327,-8.032 U5.22@29.558,-8.032
NetB13_1: B13.1 U5.26 | length 5.7
  Bottom Layer w0.254: B13.1@28.352,-1.79 29.563,-3.001 29.563,-3.376 29.947,-3.76 31,-3.76 31.136,-3.896 31.136,-3.993 31.558,-4.415 U5.26@31.558,-5.532
NetB15_1: B15.1 U5.28 | length 3.9
  Bottom Layer w0.254: B15.1@32.278,-1.79 32.278,-3.986 32.558,-4.266 U5.28@32.558,-5.532
NetB601_1: B601.1 R601.2 | length 11.4
  Top Layer w0.254: v1@55.3,-4.573 v1(55.3,-4.453) 55.3,-4.237 57.245,-2.292 v1(59.101,-2.292)
  Bottom Layer w0.254: R601.2@55.247,-5.608 55.3,-5.555 v1(55.3,-4.453) ; v1(59.101,-2.292) 59.146,-2.337 59.146,-2.343 59.598,-2.795 60.473,-2.795 61.028,-3.35 61.028,-5.162 61.001,-5.189 61.001,-5.714 B601.1@60.653,-6.062
NetB601_3: B601.3 C603.1 U6.8 | length 59.6
  Top Layer w0.254: v1(33.726,0.817) 34.438,0.105 34.648,0.105 34.988,0.445 35.242,0.445 36.215,1.419 42.766,1.419 42.836,1.349 43.183,1.349 v1(43.211,1.321) ; v1(58.324,-2.907) 58.324,-2.944 58.716,-3.336 58.716,-10.369 58.45,-10.635 58.45,-14.15 ; 58.45,-14.151 58.45,-25.979 v1(58.751,-26.28)
  Bottom Layer w0.254: v1(33.726,0.817) 33.754,0.789 34.155,0.789 34.793,0.151 C603.1@34.808,0.151 ; v1(43.211,1.321) 43.204,1.328 43.204,2.074 43.689,2.559 56.253,2.559 57.035,1.777 57.035,1.308 58.324,0.019 v1(58.324,-2.907) 58.856,-3.439 59.355,-3.439 59.703,-3.787 B601.3@59.703,-3.812 ; v1(58.751,-26.28) 58.79,-26.28 58.922,-26.411 U6.8@60.663,-26.411
NetBAT_1: BAT.1 R601.1 | length 59.5
  Top Layer w0.254: v1(22.503,-11.332) 22.503,-11.292 22.204,-10.993 22.204,-5.625 24.824,-3.005 25.225,-3.005 25.834,-2.396 27.132,-2.396 29.487,-4.751 42.023,-4.751 42.371,-5.098 46.459,-5.098 v1(46.907,-4.65) ; v1(48.965,-3.656) 50.14,-3.656 50.19,-3.705 51.978,-3.705 53.165,-4.892 v1(53.165,-8.332)
  Bottom Layer w0.254: BAT.1@21.972,-23.494 22.204,-23.262 22.204,-11.67 22.503,-11.371 v1(22.503,-11.332) ; v1(46.907,-4.65) 47.971,-4.65 v1(48.965,-3.656) ; v1(53.165,-8.332) 53.899,-8.332 54.074,-8.507 54.768,-8.507 55.247,-8.028 R601.1@55.247,-7.108
NetC13_1: C13.1 U5.2 | length 7.6
  Bottom Layer w0.254: U5.2@36.058,-14.032 36.058,-15.154 36.207,-15.303 39.018,-15.303 39.738,-14.582 40.919,-14.582 41.068,-14.433 C13.1@41.068,-13.419
NetC14_1: C14.1 U5.3 | length 8.4
  Bottom Layer w0.254: U5.3@35.558,-14.032 35.558,-15.364 35.903,-15.709 39.186,-15.709 39.907,-14.988 C14.1@42.146,-14.988
NetC15_1: C15.1 U5.4 | length 7.7
  Bottom Layer w0.254: U5.4@35.058,-14.032 35.058,-15.648 35.525,-16.116 39.837,-16.116 40.115,-15.837 40.683,-15.837 C15.1@40.768,-15.752
NetC203_1: C203.1 U2.16 | length 7.7
  Top Layer w0.254: v1(20.909,-9.837) 20.909,-11.132 21.66,-11.883 21.66,-11.885 22.274,-12.499 22.353,-12.499 v1(22.918,-13.064)
  Bottom Layer w0.254: v1(20.909,-9.837) 21.099,-10.027 U2.16@23.188,-10.027 ; v1(22.918,-13.064) v1(22.918,-13.064) 23.75,-12.234 C203.1@23.75,-12.219
NetC301_2: C301.2 U3.2 U3.3 | length 8.6
  Bottom Layer w0.254: C301.2@0.847,-10.62 0.855,-10.628 1.713,-10.628 1.862,-10.479 1.862,-9.113 2.599,-8.376 U3.2@3.31,-8.376
  Bottom Layer w0.5: U3.2@3.31,-8.376 4.768,-8.376 5.061,-8.083 5.061,-7.442 4.746,-7.127 3.331,-7.127 U3.3@3.31,-7.106
NetC302_1: C302.1 R301.2 | length 1.8
  Bottom Layer w0.254: R301.2@0.847,-7.337 C302.1@0.847,-5.554
NetC401_1: C401.1 U4.8 | length 7.1
  Top Layer w0.254: v1(50.54,-12.644) 50.54,-8.494 50.617,-8.417 v1(50.617,-7.807)
  Bottom Layer w0.254: U4.8@49.889,-13.424 U4.8@49.909,-13.404 50.314,-13.404 50.474,-13.244 50.474,-12.749 50.54,-12.684 v1(50.54,-12.644) ; v1(50.617,-7.807) 50.617,-7.78 51.289,-7.108 C401.1@51.304,-7.108
NetC601_1: C601.1 U6.1 Y2.1 | length 12.5
  Bottom Layer w0.254: Y2.1@57.141,-11.386 57.141,-13.16 57.214,-13.233 57.214,-14.754 59.339,-16.879 61.565,-16.879 61.654,-16.968 61.654,-17.59 C601.1@61.769,-17.705 61.702,-17.772 61.702,-18.352 60.781,-19.273 60.781,-20.093 U6.1@60.663,-20.211
NetC602_1: C602.1 U6.2 Y2.2 | length 15.2
  Bottom Layer w0.254: Y2.2@57.136,-9.966 57.379,-10.209 58.191,-11.021 58.191,-15.024 59.64,-16.473 62.384,-16.473 63.601,-17.69 C602.1@63.601,-17.705 63.328,-17.978 63.328,-18.061 61.933,-19.456 U6.2@61.933,-20.211
NetC901_1: C901.1 D901.1 R903.1 U9.14 | length 22.8
  Top Layer w0.254: v1(41.041,-27.225) 41.041,-28.653 41.944,-29.556 43.08,-29.556 43.794,-28.842 47.425,-28.842 49.371,-30.788 50.491,-30.788 v1(50.505,-30.774)
  Bottom Layer w0.254: v1(41.041,-27.225) 41.041,-26.592 41.116,-26.517 U9.14@41.116,-26.006 ; v1(50.505,-30.774) 50.505,-31.488 51.633,-32.616 53.984,-32.616 R903.1@54.257,-32.889 54.358,-32.99 56.101,-32.99 C901.1@56.202,-32.889 56.303,-32.99 D901.1@58.226,-32.99
NetC902_1: C902.1 U9.2 | length 13
  Bottom Layer w0.254: C902.1@25.214,-24.132 25.229,-24.132 26.416,-25.319 28.025,-25.319 30.995,-28.289 31.738,-28.289 32.688,-27.339 U9.2@32.688,-23.928
NetC902_2: C902.2 U9.3 | length 16.4
  Bottom Layer w0.254: C902.2@25.214,-22.632 25.229,-22.632 25.861,-23.264 25.95,-23.264 26.25,-23.564 26.25,-24.578 26.585,-24.913 30.449,-24.913 30.681,-24.682 30.681,-24.145 31.435,-23.39 31.435,-21.968 31.775,-21.628 32.956,-21.628 33.297,-21.968 33.297,-21.987 33.297,-22.05 33.388,-22.141 33.388,-23.8 33.388,-25.978 U9.3@33.416,-26.006
NetC903_1: C903.1 U9.4 | length 8.7
  Bottom Layer w0.254: C903.1@27.265,-24.132 27.538,-24.405 28.423,-24.405 31.607,-21.221 33.25,-21.221 33.997,-21.968 33.997,-21.987 33.997,-22.05 U9.4@34.116,-22.169
NetC903_2: C903.2 U9.5 | length 13.6
  Bottom Layer w0.254: C903.2@27.265,-22.632 27.28,-22.632 28.345,-23.698 28.556,-23.698 31.438,-20.815 33.544,-20.815 34.697,-21.968 34.697,-22.05 34.788,-22.141 34.788,-23.764 34.788,-25.978 U9.5@34.816,-26.006
NetC905_2: C905.2 U9.27 | length 16.7
  Top Layer w0.254: v1(50.288,-27.491) 50.316,-27.463 50.624,-27.463 51.366,-26.721 52.847,-26.721 53.963,-25.605 53.963,-22.567 55.146,-21.384 55.146,-20.789 56.273,-19.662 v1(56.273,-19.028)
  Bottom Layer w0.254: U9.27@50.216,-24.009 50.216,-26.6 50.288,-26.672 v1(50.288,-27.491) ; C905.2@55.139,-19.237 56.064,-19.237 v1(56.273,-19.028)
NetC906_2: C906.2 U9.28 | length 6.3
  Bottom Layer w0.254: U9.28@50.916,-22.169 51.035,-22.05 51.035,-21.968 51.375,-21.628 52.556,-21.628 52.897,-21.968 52.897,-23.263 53.785,-24.151 C906.2@55.145,-24.151